# Altium PCB MCU.PcbDoc
Units mil, origin at the board's own origin, x right, y up, seen from the top; angles counter-clockwise.
Board outline 1670 x 1220 mil, 2 copper layers (Top Layer, Bottom Layer); 50 components, 44 nets, 204 pads, 94 vias.
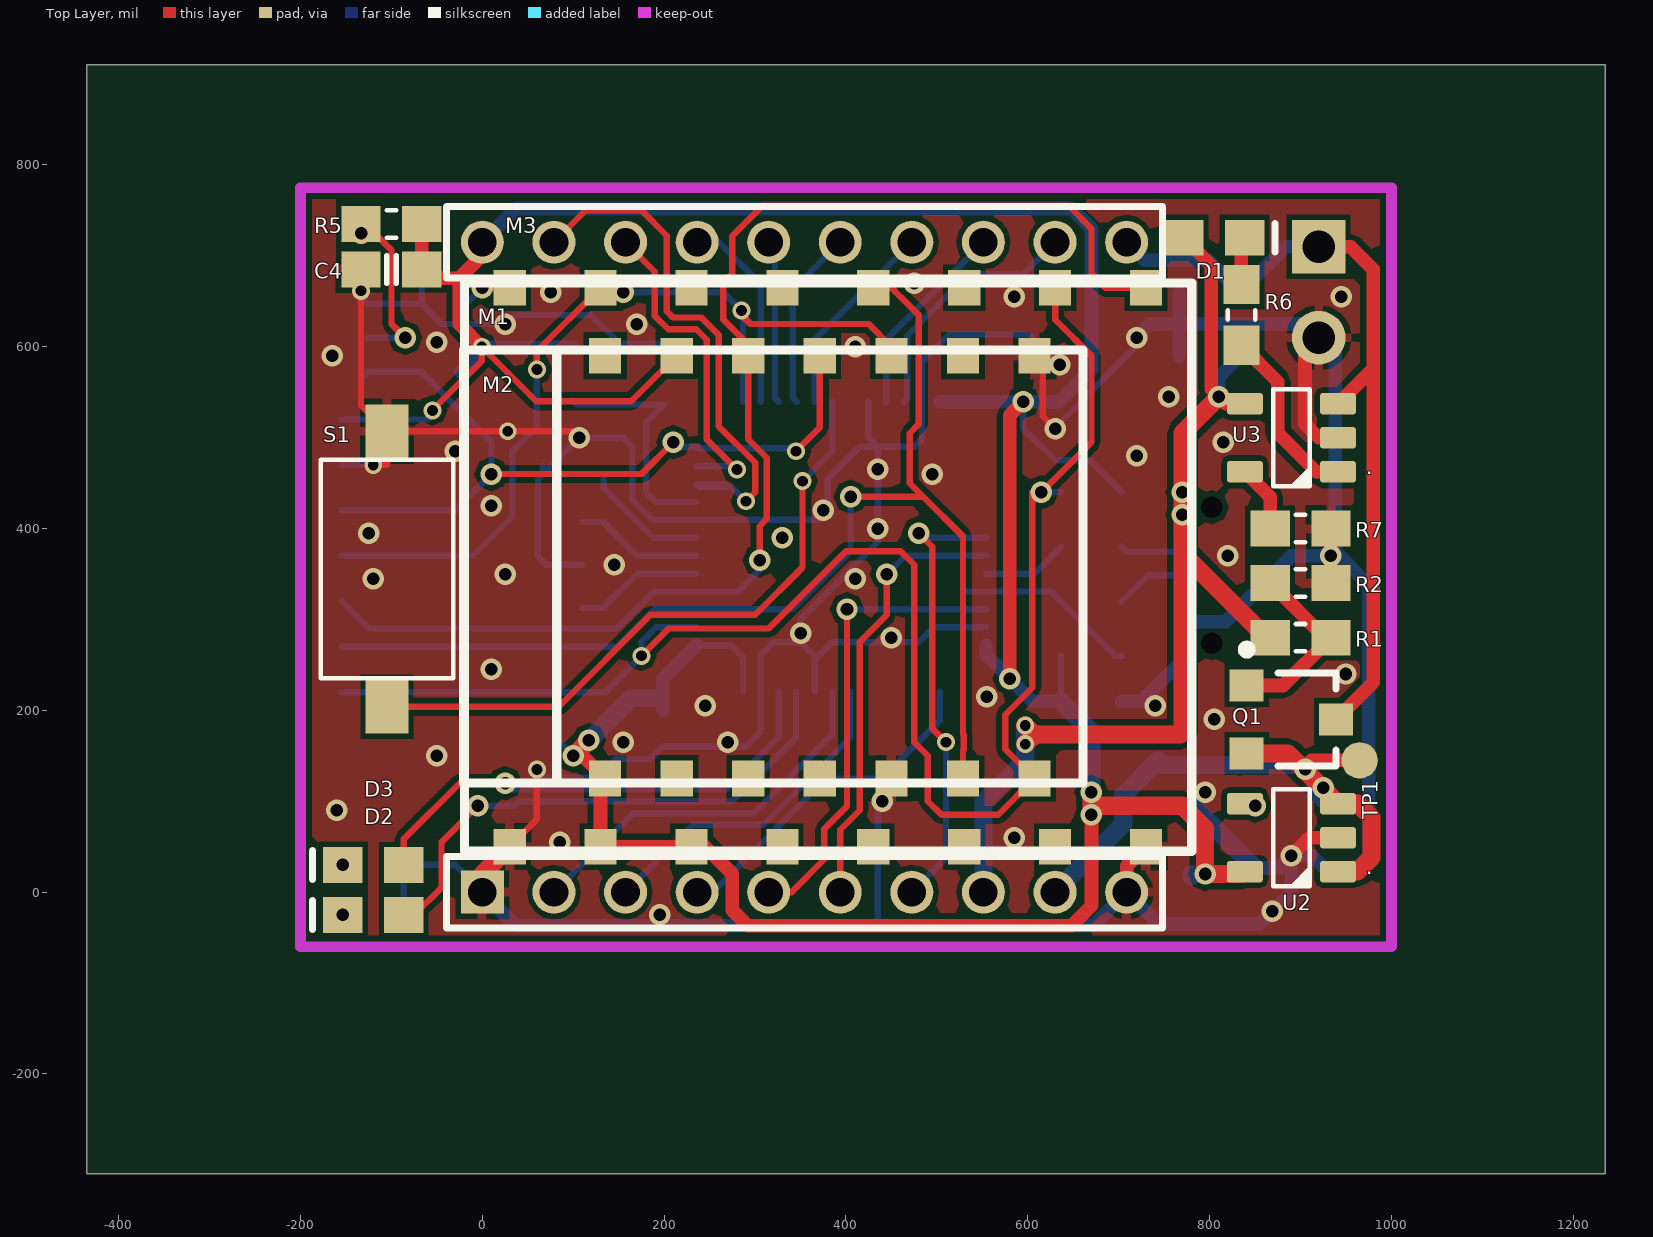
[diagram p0: Top Layer view]
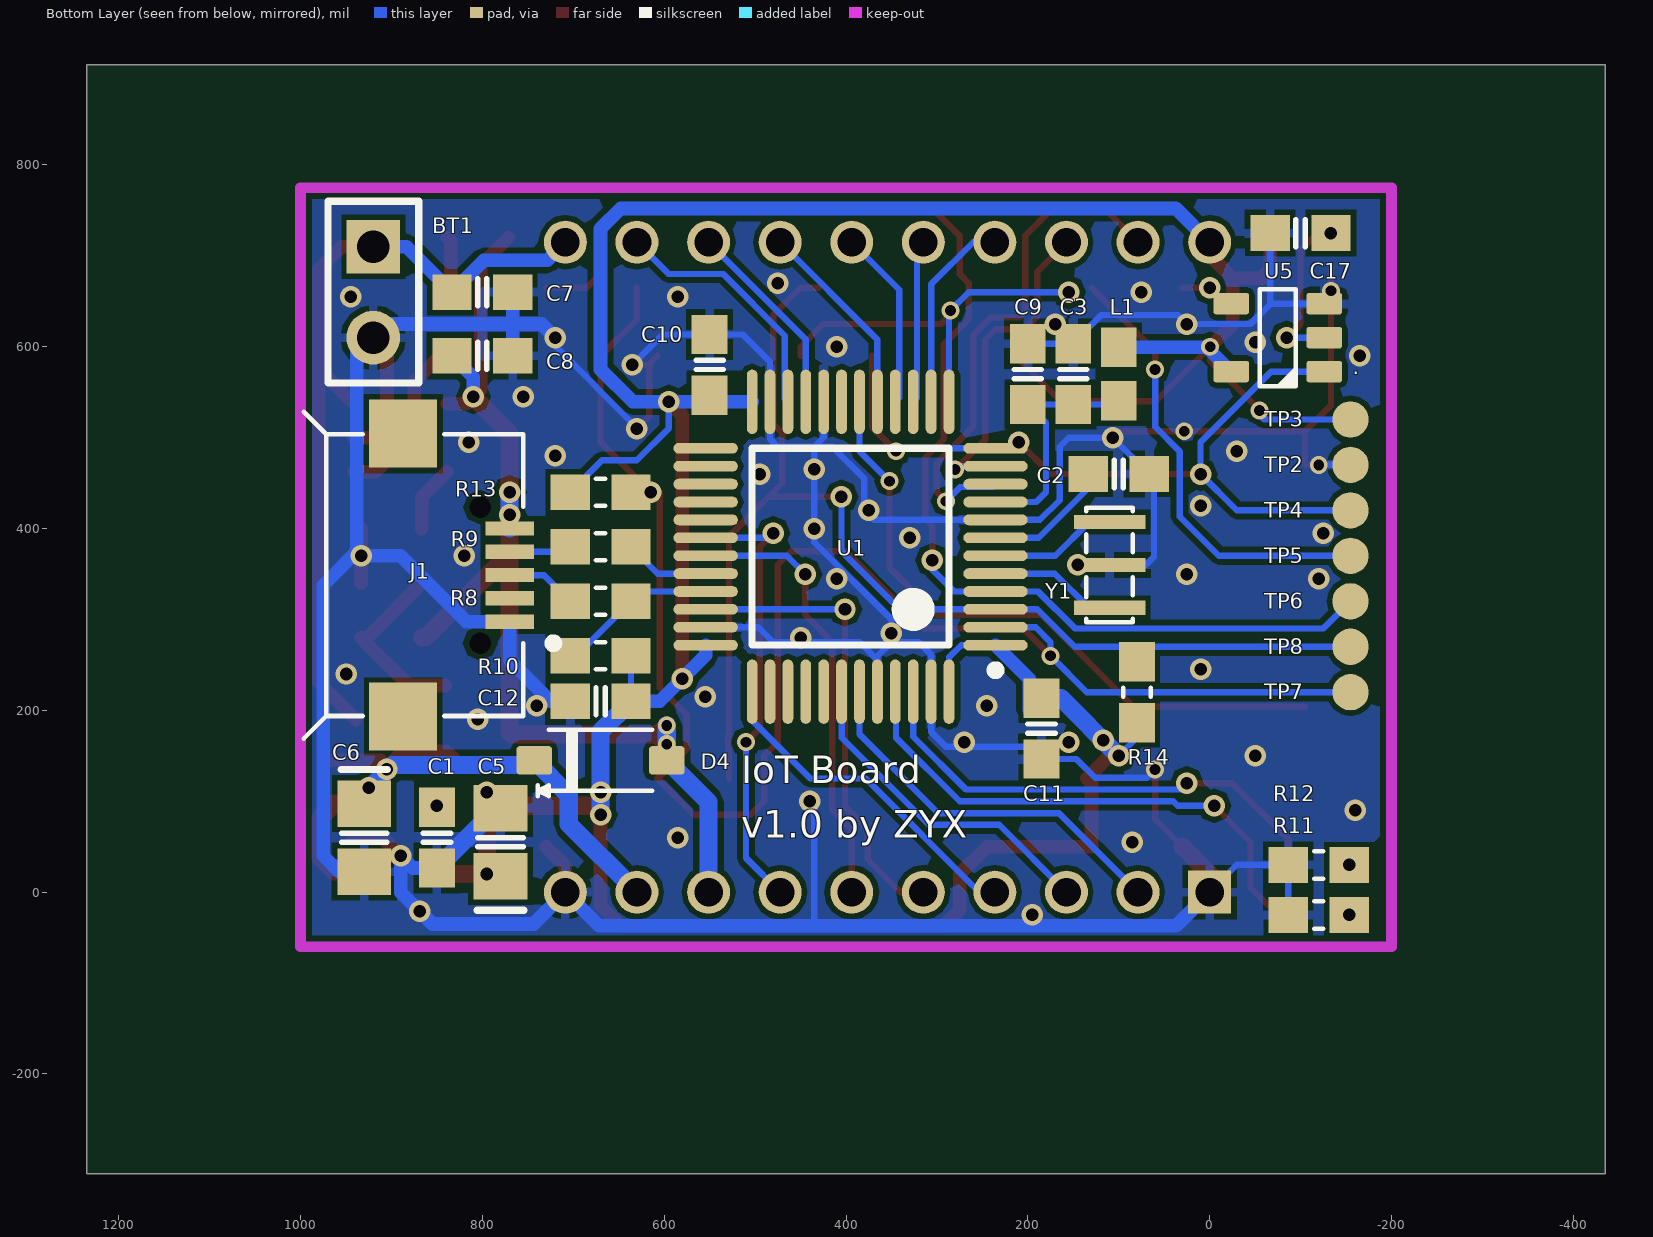
[diagram p1: Bottom Layer view, seen from below]

## Layer stack, top to bottom
Top Layer: signal copper 1.4
Dielectric: dielectric 12.6, FR-4, Dk 4.8
Bottom Layer: signal copper 1.4

## Board outline
-435,-310 1235,-310 1235,910 -435,910

## Design rules (kind name [scope] priority, off if disabled: settings)
Clearance [All] p1: gap=6
ComponentClearance [All] p1: gap=0 collisioncheckmode=3 verticalgap=0 showdistances=FALSE
DiffPairsRouting [All] p1: maxlimit=10 minlimit=10 mostfreqgap=10 maxuncoupledlength=500
HoleToHoleClearance [All] p1: gap=7.87 allowstackedmicrovias=TRUE
MinimumSolderMaskSliver [All] p1: minsoldermaskwidth=0
PolygonConnect PolygonConnect_1 [isvia vs IsPolygon] p1: connectstyle=Direct reliefconductorwidth=10 reliefentries=4 polygonreliefangle="90 Angle"
PolygonConnect [All] p2: connectstyle=Relief reliefconductorwidth=10 reliefentries=4 polygonreliefangle="90 Angle"
RoutingVias [All] p1: holewidth=13.78 width=23.62 viastyle="Through Hole" minholewidth=11.81 minwidth=19.68 maxholewidth=19.68 maxwidth=50
SilkToSilkClearance [All] p1: silktosilkclearance=0
SilkscreenOverComponentPads [All] p1: minsilkscreentomaskgap=0
SolderMaskExpansion [All] p1: expansion=4
Width [All] p1: maxlimit=30 minlimit=7 preferedwidth=7
22 further rules are at their usual default settings.

## Classes and differential pairs
differential pair USB: +USB_P -USB_N

## Components (designator, comment, footprint, x,y, rotation, side; value= is the part's Value field where it differs from the comment)
BT1 "Li-Ion" HDR1X2 920,710 r270 bottom
C1 "Cap Semi" C-1608[0603] 850,60 r270 bottom
C2 "Cap Semi" C-1608[0603] 100,460 r0 bottom
C3 "Cap Semi" C-1608[0603] 150,570 r270 bottom
C4 "Cap Semi" C-1608[0603] -100,685 r0 top
C5 "Cap Semi" C-2012[0805] 780,55 r90 bottom
C6 "Cap Semi" C-2012[0805] 930,60 r270 bottom
C7 "Cap Semi" C-1608[0603] 800,660 r0 bottom
C8 "Cap Semi" C-1608[0603] 800,590 r0 bottom
C9 "Cap Semi" C-1608[0603] 200,570 r270 bottom
C10 "Cap Semi" C-1608[0603] 550,580 r270 bottom
C11 "Cap Semi" C-1608[0603] 185,180 r90 bottom
C12 "Cap Semi" C-1608[0603] 670,210 r180 bottom
C17 "Cap Semi" C-1608[0603] -100,725 r180 bottom
D1 "Charge" LED-1608[0603]-R 805,720 r0 top
D2 "G" LED-1608[0603]-G -120,-25 r180 top
D3 "B" LED-1608[0603]-B -120,30 r180 top
D4 "1N5819" SOD123 670,145 r180 bottom
J1 "USB Micro Type B" "MICRO USB 3D" 770,400 r0 bottom
L1 "Inductor" L-1608[0603] 100,570 r270 bottom
M1 "MT7681 Module" MT7681-EXTANT-1 30,50 r0 top
M2 "ESP8266-ESP03" ESP8266-ESP03 135,125 r0 top
M3 "MCU_IF_V1" MCU_IF_V1 0,0 r0 top
Q1 "SI2301" SOT23B 890,190 r270 top
R1 "Res Semi" R-1608[0603] 900,280 r0 top
R2 "Res Semi" R-1608[0603] 900,340 r0 top
R5 "Res Semi" R-1608[0603] -100,735 r180 top
R6 "Res Semi" R-1608[0603] 835,635 r270 top
R7 "Res Semi" R-1608[0603] 900,400 r180 top
R8 "Res Semi" R-1608[0603] 670,320 r180 bottom
R9 "Res Semi" R-1608[0603] 670,380 r180 bottom
R10 "Res Semi" R-1608[0603] 670,260 r180 bottom
R11 "Res Semi" R-1608[0603] -120,-25 r0 bottom
R12 "Res Semi" R-1608[0603] -120,30 r0 bottom
R13 "Res Semi" R-1608[0603] 670,440 r180 bottom
R14 "Res Semi" R-1608[0603] 80,220 r90 bottom
S1 "Button" SW-2PIN-SMD -105,200 r90 top
TP1 "VDD" TESTPOINT 965,145 r90 top
TP2 "GND" TESTPOINT -155,470 r90 bottom
TP3 "VCC" TESTPOINT -155,520 r90 bottom
TP4 "W_RXD" TESTPOINT -155,420 r90 bottom
TP5 "W_TXD" TESTPOINT -155,370 r90 bottom
TP6 "W_RST" TESTPOINT -155,320 r90 bottom
TP7 "W_IO0" TESTPOINT -155,220 r90 bottom
TP8 "W_IO2" TESTPOINT -155,270 r90 bottom
U1 "STM32F103CBT6" LQFP48_N 395,380 r0 bottom
U2 "MIC5219-3.3" SOT23-5 890,60 r180 top
U3 "MCP73831" SOT23-5 890,500 r180 top
U5 "74LVC1G08" SOT23-5 -75,610 r0 bottom
Y1 "8M" Crystal_C 110,360 r90 bottom

## Footprints (in the part's own frame and the unit in brackets; to place one, negate y for a bottom-side part, rotate by r counter-clockwise, add the part's x,y. Pads: shape width x height; smd on the part's side, far side on the other; paste and mask are expansions set on the pad)
C-1608[0603] [mm] "Chip Capacitor; Body 1.6 x 0.8 mm (LxW typ)"
  rect 1.1x1 smd: 1(-0.85,0) 2(0.85,0)
  silkscreen extent -0.13,-0.38 0.13,0.38, body extent -0.8,-0.42 0.8,0.38, height 0.29
C-2012[0805] [mm] "Chip Capacitor; Body 2.0 x 1.2 mm (LxW typ)"
  rect 1.3x1.5 smd: 1(-0.95,0) 2(0.95,0)
  silkscreen extent -1.9,-0.65 0.13,0.65, body extent -1,-0.64 1,0.62, height 0.78
Crystal_C [mm] "含电容晶振，村田 3."
  rect 0.4x2 smd: 1(-1.2,0) 2(0,0) 3(1.2,0)
  silkscreen extent -1.6,-0.65 1.6,0.65, body extent -1.6,-0.64 1.6,0.67, height 0.7
ESP8266-ESP03 [mm]
  rect 0.9x1 smd: 1(0,0) 2(2,0) 3(4,0) 4(6,0) 5(8,0) 6(10,0) 7(12,0) 8(12,11.811) 9(10,11.811) 10(8,11.811) 11(6,11.811) 12(4,11.811) 13(2,11.811) 14(0,11.811)
  silkscreen extent -3.95,-0.13 13.35,11.97
HDR1X2 [mm] "Connector; Header; 2 Position"
  rect 1.5x1.5 hole 0.9: 1(0,0)
  round 1.5 hole 0.9: 2(2.54,0)
  silkscreen extent -1.27,-1.27 3.81,1.27
L-1608[0603] [mm] "Chip Inductor, Body 1.6x0.8mm, IPC Medium Density"
  rect 1.1x1 smd: 1(-0.75,0) 2(0.75,0)
  body extent -0.8,-0.41 0.8,0.39, height 0.45
LED-1608[0603]-B [mm] "Chip Diode; Body 1.6 x 0.8 mm (LxW typ)"
  rect 1.1x1 smd: 1(-0.85,0) 2(0.85,0)
  silkscreen extent 1.7,-0.4 1.7,0.4, body extent -0.85,-0.44 0.85,0.46, height 0.9
LED-1608[0603]-G [mm] "Chip Diode; Body 1.6 x 0.8 mm (LxW typ)"
  rect 1.1x1 smd: 1(-0.85,0) 2(0.85,0)
  silkscreen extent 1.7,-0.4 1.7,0.4, body extent -0.85,-0.44 0.85,0.46, height 0.9
LED-1608[0603]-R [mm] "Chip Diode; Body 1.6 x 0.8 mm (LxW typ)"
  rect 1.1x1 smd: 1(-0.85,0) 2(0.85,0)
  silkscreen extent 1.7,-0.4 1.7,0.4, body extent -0.82,-0.44 0.88,0.46, height 0.9
LQFP48_N [mm] "Thin QFP, 48-Leads, Body 7x7mm, Pitch 0.5mm, IPC Medium Density"
  oval 1.8x0.3 smd: 1(-4.05,2.75) 2(-4.05,2.25) 3(-4.05,1.75) 4(-4.05,1.25) 5(-4.05,0.75) 6(-4.05,0.25) 7(-4.05,-0.25) 8(-4.05,-0.75) 9(-4.05,-1.25) 10(-4.05,-1.75) 11(-4.05,-2.25) 12(-4.05,-2.75) 25(4.05,-2.75) 26(4.05,-2.25) 27(4.05,-1.75) 28(4.05,-1.25) 29(4.05,-0.75) 30(4.05,-0.25) 31(4.05,0.25) 32(4.05,0.75) 33(4.05,1.25) 34(4.05,1.75) 35(4.05,2.25) 36(4.05,2.75)
  oval 0.3x1.8 smd: 13(-2.75,-4.05) 14(-2.25,-4.05) 15(-1.75,-4.05) 16(-1.25,-4.05) 17(-0.75,-4.05) 18(-0.25,-4.05) 19(0.25,-4.05) 20(0.75,-4.05) 21(1.25,-4.05) 22(1.75,-4.05) 23(2.25,-4.05) 24(2.75,-4.05) 37(2.75,4.05) 38(2.25,4.05) 39(1.75,4.05) 40(1.25,4.05) 41(0.75,4.05) 42(0.25,4.05) 43(-0.25,4.05) 44(-0.75,4.05) 45(-1.25,4.05) 46(-1.75,4.05) 47(-2.25,4.05) 48(-2.75,4.05)
  silkscreen extent -4.17,-2.75 2.75,3.57, body extent -3.5,-3.5 3.5,3.5, height 1.6
MCU_IF_V1 [mm]
  rect 1.2x1.2 hole 0.8: 1(0,0)
  round 1.2 hole 0.8: 2(2,0) 3(4,0) 4(6,0) 5(8,0) 6(10,0) 7(12,0) 8(14,0) 9(16,0) 10(18,0) 11(18,18.161) 12(16,18.161) 13(14,18.161) 14(12,18.161) 15(10,18.161) 16(8,18.161) 17(6,18.161) 18(4,18.161) 19(2,18.161) 20(0,18.161)
  silkscreen extent -1,-1 19,19.16, body extent -0.97,-1 18.97,19.16, height 6
"MICRO USB 3D" [mm]
  rect 1.35x0.4 smd: 1(0,0) 2(0,0.65) 3(0,1.3) 4(0,1.95) 5(0,2.6)
  round 0 hole 0.6: HOLE(0.827,-0.6) HOLE(0.827,3.2)
  rect 1.9x1.9 smd: ""(2.977,-2.65) ""(2.977,5.25)
  silkscreen extent -1.35,-3.27 5.76,5.87, body extent -0.29,-3.13 5.33,5.67, height 2.79
MT7681-EXTANT-1 [mm]
  rect 0.9x1 smd: 1(0,0) 2(2.54,0) 3(5.08,0) 4(7.62,0) 5(10.16,0) 6(12.7,0) 7(15.24,0) 8(17.78,0) 9(17.78,15.621) 10(15.24,15.621) 11(12.7,15.621) 12(10.16,15.621) 13(7.62,15.621) 14(5.08,15.621) 15(2.54,15.621) 16(0,15.621)
  silkscreen extent -1.26,-0.13 19.06,15.75
R-1608[0603] [mm] "Chip Resistor; Body 1.6 x 0.8 mm (LxW typ)"
  rect 1.1x1 smd: 1(-0.85,0) 2(0.85,0)
  silkscreen extent -0.13,-0.38 0.13,0.38, body extent -1.27,-0.51 1.33,0.49, height 0.48
SOD123 [mm] "SOD-123; 2 Leads; Body 2.7 x 1.6 mm, (LxW)"
  round 0.508 on Mech15: 0(0,0)
  rrect25% 1x0.8 smd: 1(1.85,0) 2(-1.85,0)
  silkscreen extent -1.75,-1 1.45,0.85, body extent -1.95,-0.9 1.95,0.9, height 1.18
SOT23-5 [mm]
  round 0.5 on Mech15: 0(0,0)
  rrect25% 1x0.6 smd: 1(-1.3,0.95) 2(-1.3,0) 3(-1.3,-0.95) 4(1.3,-0.95) 5(1.3,0.95)
  silkscreen extent -0.51,-1.35 0.51,1.35, body extent -1.4,-1.45 1.4,1.45, height 1.44
SOT23B [mm] "SOT-23; 3 Leads; Body 3.0 x 2.6 mm, inc. leads (LxW max)"
  rect 0.9x0.95 smd: 1(-0.95,-1.25) 2(0.95,-1.25) 3(0,1.25)
  silkscreen extent -2.07,-1.37 1.3,1.25, body extent -1.52,-1.27 1.48,1.27, height 1.1
SW-2PIN-SMD [mm] "3*6*2.5mm Button"
  rect 1.5x1.2 smd: 1(0.1,0) 2(7.8,0)
  silkscreen extent 0.9,-1.85 7,1.85, body extent -0.08,-1.8 7.92,1.8, height 2.5
TESTPOINT [mil]
  round 40 smd: 1(0,0)

## Part data
BT1: library part Battery, "Multicell Battery"
C1 C2 C3 C4 C5 C6 C7 C8 C9 C10 C11 C12 C17: "Capacitor (Semiconductor SIM Model)"
D1 D2 D3: library part LED2, "Typical RED, GREEN, YELLOW, AMBER GaAs LED"
D4: library part "D Schottky", "Schottky Diode"
J1: library part USB_Micro_TypeB, "Connector SMD USB Micro Type B middle mount"
M1: library part MT7681_EXTANT_1
Q1: library part MOSFET-P, "P-Channel MOSFET"
R1 R2 R5 R6 R7 R8 R9 R10 R11 R12 R13 R14: "Semiconductor Resistor"
S1: library part SW-PB, "Switch"
TP1 TP2 TP3 TP4 TP5 TP6 TP7 TP8: library part Plug, "Plug"
U1: "STM32 ARM-based 32-bit MCU with 128 Kbytes Flash, 48-pin LQFP, Industrial Temperature"
U2: library part MIC5219, "500mA-Peak Output LDO Regulator"
U3: "Miniature Single-Cell, Fully Integrated Li-Ion, Li-Polymer Charge Management Controllers"
Y1: library part XTAL_C, "Crystal Oscillator"

## Via types
v1: diameter 23.62, hole 13.78, Top Layer to Bottom Layer, tented both sides, 77 vias
v2: diameter 19.68, hole 11.81, Top Layer to Bottom Layer, tented both sides, 16 vias
v3: diameter 23.62, hole 13.78, Top Layer to Bottom Layer, 1 vias

## Nets (pads, with @x,y where several pads share a name; then routed paths per layer and width w, separated by ;. In a path a pad name is that pad's centre, name@x,y a point inside that pad or via, vN(x,y) a via of type N, cw(c..) or ccw(c..) an arc to the next point about the centre after c; other vN are vias at no path point)
AVCC: C3.2 C9.2 L1.2 U1.9 | length 266.5
  Bottom Layer w7: L1.2 103.94,536.54 C9.2 180,516.54 180,440 190.79,429.21 U1.9
GND: BT1.2 C1.2 C2.1 C3.1 C4.1 C5.2 C6.2 C7.1 C8.1 C9.1 C10.1 C11.1 C12.1 C17.1 J1.5 M1.1 M1.8 M2.5 M2.8 M3.1 M3.10 R2.2 R7.1 R11.2 R12.2 S1.2 TP2.1 U1.8 U1.20 U1.23 U1.35 U1.44 U1.47 U2.2 U3.2 U5.3 Y1.2 | length 6414.1
  Top Layer w7: C4.1 v2(-133.46,661.54) -133.46,535.55 S1.2 ; v2(-120,470) -105,470 S1.2 ; M1.1 60,80 v2(60,135) ; v1(106.54,500) 99.45,507.09 v2(27.91,507.09) S1.2 ; v1@625,510 v1(630,510) 616.31,523.69 616.31,581.13 M2.8 617.44,580 v1(635,580)
  Top Layer w15: M3.10 708.66,28.66 M1.8 ; v1(890,40) 910,60 U2.2 ; BT1.2 905,595 905,515 920,500 U3.2 ; R2.2 R7.1
  Top Layer w20: M3.1 0,20 M1.1
  Bottom Layer w7: TP2.1 v2(-120,470) ; v2(-133.46,661.54) -133.46,654.68 U5.3 -67.4,647.4 ; R11.2 R12.2 -30,30 M3.1 ; C17.1 -66.54,648.27 -67.4,647.4 ; v2(60,135) 69,126 126,126 146.54,146.54 C11.1 198.46,160 290,160 306.42,176.42 306.42,261.42 320,275 v1@350,275 ; C2.1@66.54,468.46 C2.1 ; Y1.2 70,360 61.13,368.87 61.13,454.59 C2.1 ; C9.1 C3.1 150,604.3 119.3,635 35,635 v1(25,625) -45,625 -67.4,647.4 ; U1.20 424.53,500.47 435,490 ; 435,-37.12 435,100 v1(440,100) ; U1.35 496.42,291.42 480,275 385,275 365.47,255.47 U1.44 365.47,259.53 v1@350,275 ; v1@625,510 v1(630,510) ; v1@629.52,510.48 720,600.96 v1(720,610) v1@716.54,613.46 ; v1(635,580) 601.54,613.46 C10.1 513.46,613.46 483.58,583.58 483.58,498.58 475,490 435,490 ; C2.1 v1(106.54,500) 155,500 165,490 165,431.31 186.78,409.53 U1.8 369.53,409.53 380,420 380,455 415,490 435,490 ; v1@350,275 350,300 435,385 435,490
  Bottom Layer w15: M3.1 37.12,-37.12 671.54,-37.12 M3.10 743.66,-35 855,-35 890,0 v1(890,40) ; C12.1 725,210 770,255 J1.5 817.64,297.64 890,370 v1(933.46,370) v1@938.11,374.64 ; v1(720,610) 735,625 905,625 BT1.2 938.11,591.89 v1@938.11,374.64 ; C8.1 C7.1 ; C5.2 C5.2@784.13,92.4 ; C1.2 876.54,26.54 v1(890,40) ; v1(890,40) 912.6,40 C6.2 957.6,22.6 975,40 975,337.75 v1@938.11,374.64
  Bottom Layer w20: C5.2@784.13,92.4 C1.2
  other v1: 195,-25 868.8,-21.2 85,55 585,60 -160,90 795,110 -50,150 155,165 270,165 805,190 245,205 740,205 555,215 950,240 10,245 450,280 350,285 -120,345 25,350 145,360 820,370 330,390 -125,395 435,400 375,420 10,425 495,460 435,465 720,480 -30,485 815,495 755,545 -165,590 410,600 -50,605 170,625 585,655 945,655 75,660 475,670
  other v3: 410,345
KEY: S1.1 U1.18 | length 716.6
  Top Layer w7: S1.1 83.94,203.94 185,305 300,305 352.17,357.17 v2(352.17,452.17)
  Bottom Layer w7: v2(352.17,452.17) 385.16,485.16 U1.18
LED_B: D3.1 U1.46 | length 547.1
  Top Layer w7: D3.1 -86.54,58.46 -25,120 v1(25,120)
  Bottom Layer w7: v1(25,120) 25,113 268,113 326.1,171.1 U1.46
LED_G: D2.1 U1.45 | length 592.1
  Top Layer w7: D2.1 -75,-25 -45,5 -45,55 v1(-5,95)
  Bottom Layer w7: v1(-5,95) 35,95 40,100 275,100 345,170 U1.45@345,220.55
MT_RX: M1.16 U5.4 | length 61.1
  Top Layer w7: v1(0,665) M1.16
  Bottom Layer w7: U5.4 -17.6,647.4 v1(0,665)
NetC1_1: C1.1 U2.4
  other v1: 850,95
NetC2_2: C2.2 U1.7 | length 140.3
  Bottom Layer w7: C2.2 133.46,444.46 158.87,419.05 188.08,389.84 199.03,389.84 U1.7
NetC17_2: C17.2 R5.2 U5.2 | length 189.1
  Top Layer w7: R5.2 -128.69,735 -100,706.31 -100,625 v1(-85,610)
  Bottom Layer w7: U5.2 v1(-85,610)
  other v1: -133.46,725
NetD1_2: D1.2 R6.1 | length 53
  Top Layer w15: R6.1 835,716.54 D1.2
NetD2_2: D2.2 R11.1
  other v1: -153.46,-25
NetD3_2: D3.2 R12.1
  other v1: -153.46,30
NetJ1_2: J1.2 R9.1 | length 68.9
  Bottom Layer w7: R9.1 709.05,374.41 J1.2
NetJ1_3: J1.3 R8.1 | length 78.5
  Bottom Layer w7: R8.1 732.28,348.82 J1.3
NetQ1_2: Q1.1 R1.2 R2.1 | length 206.2
  Top Layer w15: Q1.1 880.87,227.4 R1.2 926.97,280 866.97,340 R2.1
NetR6_2: R6.2 U3.1 | length 196.8
  Top Layer w15: R6.2 875,561.54 875,505 917.4,462.6 U3.1
NetR7_2: R7.2 U3.5 | length 74.1
  Top Layer w15: U3.5 866.54,434.88 R7.2
NetU1_5: U1.5 Y1.1 | length 141.2
  Bottom Layer w7: Y1.1 132.76,312.76 170.47,350.47 U1.5
NetU1_6: U1.6 Y1.3 | length 140.9
  Bottom Layer w7: Y1.3 132.76,407.24 169.84,370.16 U1.6
PA0: M3.19 U1.10 | length 598.7
  Top Layer w7: M3.19 113.74,750 175,750 202.78,722.22 202.78,639.16 209.76,632.19 240.78,632.19 260,612.96 260,512.35 300,472.35 300,440 v2(290,430)
  Bottom Layer w7: U1.10@267.18,448.9 U1.10 238.79,445.66 274.34,445.66 v2(290,430)
PA1: M3.18 U1.11 | length 364.9
  Top Layer w7: M3.18 189.78,682.7 189.78,633.78 204.38,619.19 235.39,619.19 247,607.58 247,498 v2(280,465)
  Bottom Layer w7: U1.11 276.42,468.58 v2(280,465)
PA4: M3.17 U1.14 | length 218.6
  Bottom Layer w7: M3.17 260,715 306.42,668.58 U1.14
PA5: M3.16 U1.15 | length 199.8
  Bottom Layer w7: M3.16@301.1,701.14 M3.16 321.82,708.14 321.82,543.73 U1.15
PA6: M3.15 U1.16 | length 198.9
  Bottom Layer w7: U1.16 341.51,543.73 341.51,662.81 M3.15
PA7: M3.14 U1.17 | length 219.9
  Bottom Layer w7: U1.17 365.47,608.03 M3.14
PA9: M3.7 U1.30 | length 499.6
  Top Layer w7: v1(480,395) 495,380 495,180 v2(510,165)
  Bottom Layer w7: M3.7 510,37.56 v2(510,165) ; v1(480,395) 485.16,389.84 U1.30
PA10: M3.6 U1.31 | length 489.1
  Top Layer w7: M3.6 393.7,68.7 415,90 415,275.14 441.17,301.31 441.31,301.31 445,305 v1(445,350)
  Bottom Layer w7: v1(445,350) 465.16,370.16 U1.31
PA13: M3.5 U1.34 | length 514.8
  Top Layer w7: M3.5 340,0 376.1,36.1 376.1,69.49 401.1,94.49 v1(401.1,311.1)
  Bottom Layer w7: v1(401.1,311.1) U1.34
PA14: M3.4 U1.37 | length 376.9
  Bottom Layer w7: M3.4 253.38,0 378.38,125 439.35,125 503.27,188.92 U1.37
PB6: M3.3 U1.42 | length 368.4
  Bottom Layer w7: M3.3 231.48,74 309,74 404.84,169.84 U1.42
PB7: M3.2 U1.43 | length 425.3
  Bottom Layer w7: M3.2 165.74,87 298.62,87 385.16,173.54 U1.43
PB10: M3.13 U1.21 | length 219.9
  Bottom Layer w7: U1.21 444.21,583.03 444.21,608.03 M3.13
PB11: M3.12 U1.22 | length 279.4
  Bottom Layer w7: U1.22 467.28,542.83 467.28,587.28 467.28,612.28 535,680 594.92,680 M3.12
USB_N: R9.2 U1.32 | length 94.3
  Bottom Layer w7: U1.32 607.01,350.47 R9.2
USB_P: R8.2 R10.1 U1.33 | length 203.3
  Bottom Layer w7: U1.33@529.45,330.79 625.75,330.79 696.54,260 R10.1
VBAT: BT1.1 C7.2 M3.11 Q1.3 U3.3 | length 892
  Top Layer w15: BT1.1 955,710 980,685 980,576.22 ; Q1.3 980,230.79 980,576.22 ; U3.3 980,576.22
  Bottom Layer w15: M3.11 728.66,695 798.46,695 C7.2 883.46,710 BT1.1
VCC: C4.2 C5.1 C10.2 C11.2 C12.2 L1.1 M1.2 M1.3 M2.1 M2.13 M3.20 R5.1 R10.2 R13.1 R14.1 TP3.1 U1.1 U1.24 U1.36 U1.48 U2.5 U5.5 | length 4094.9
  Top Layer w7: v2(-55,530) -0.62,584.38 v2(-0.62,600) 59.38,540 163.74,540 M2.13
  Top Layer w15: R5.1 C4.2 -57.02,675.48 -25.31,675.48 ; M3.20@-5,720 M3.20 0,700.8 -25.31,675.48 ; v2(-0.62,600) -25.31,624.69 -25.31,675.48 ; v1(100,150) 110,150 M2.1 130,120 M1.2 245,50 275,20 275,-20 292.12,-37.12 647.88,-37.12 670,-15 v1@670,95 ; v1(580,235) 580,524.45 v1(595,539.45)
  Top Layer w20: v1(100,150) v1(117.22,167.22) ; v1(670,110) 670,95 770,95 795,70 v1(795,20) 836.22,20 U2.5
  Bottom Layer w7: TP3.1 -60,520 -55,525 v2(-55,530) ; R14.1 80,170 v1(100,150) ; U1.1 273.27,271.73 286.73,258.27 U1.48 ; v1(595,539.45) 595,510 630,475 668.46,475 R13.1 ; C12.2 R10.2
  Bottom Layer w15: U5.5 3.11,599.53 L1.1 ; M3.20 37.12,752.12 647.88,752.12 670,730 670,575 634.45,539.45 U1.24 ; C11.2@198.46,200 198.46,234.65 U1.1 ; U1.36 554.45,260.55 605,210 C12.2
  Bottom Layer w20: v1(100,150) 163.46,213.46 C11.2 ; C12.2 670,176.54 v1(670,85) ; C5.1 C5.1@780,20
VDD: C6.1 D4.2 M3.9 Q1.2 TP1.1 U2.1 U2.3 | length 739
  Top Layer w15: v1@902.64,135.94 911.69,145 TP1.1
  Top Layer w20: Q1.2@833.19,145 Q1.2 885.98,152.6 U2.3 962.6,97.4 978.09,81.91 978.09,38.09 962.6,22.6 U2.1
  Bottom Layer w20: M3.9 705,75.08 705,107.17 D4.2 747.93,139.91 898.68,139.91 C6.1@924.29,114.29 ; C6.1@914.14,113.26 C6.1
  other v1: 925,115 905,135
VUSB: C8.2 D1.1 D4.1 J1.1 M3.8 R1.1 U3.4 | length 1234
  Top Layer w15: D1.1 801.81,689.72 801.81,553.19 v1(810,545) 817.6,537.4 U3.4
  Top Layer w20: v2(597.17,162.83) 607.81,173.48 767.81,173.48 767.81,175 770,175 770,372.57 ; v2(597.17,183.28) 606.97,173.48 ; v1(810,545) 770,505 770,372.57 ; R1.1 862.57,280 770,372.57
  Bottom Layer w15: v1(810,545) 810,566.54 C8.2
  Bottom Layer w20: M3.8 551.18,99.02 D4.1 v2(597.17,162.83) v2(597.17,183.28) ; J1.1 v1(770,440)
  other v1: 770,415
W_IO0: M1.10 M2.7 R13.2 TP7.1 U1.2 | length 1857.6
  Top Layer w7: v2(175,260) 205,290 315,290 400,375 460,375 475,360 475,165 490,150 490,100 505,85 567.44,85 M2.7 ; M2.7 575,157.42 575,195 605,225 605,440 v1(615,440) 670,495 670,589.86 630,629.86 M1.10
  Bottom Layer w7: TP7.1 135,220 v2(175,260) 175,275 191.42,291.42 U1.2 U1.2@203.92,291.42 ; v1(615,440) R13.2
W_IO2: M1.12 M2.6 R14.2 TP8.1 U1.3 | length 1345
  Top Layer w7: v1(405,435) 485,435 ; M1.12 450,665 453.69,661.31 453.69,661.17 466.17,648.69 466.31,648.69 480,635 480,515 470,505 470,450 485,435 ; M2.6 528.7,156.35 529.34,156.99 529.34,173.01 528.7,173.65 528.7,391.3 485,435
  Bottom Layer w7: TP8.1 148.38,270 189.49,311.1 U1.3 341.1,311.1 405,375 v1(405,435)
W_RST: M1.9 M2.12 TP6.1 U1.4 | length 1428.9
  Top Layer w7: v1(305,365) 305,402.66 313,410.66 313,477.74 292.48,498.26 292.48,602.52 265,630 265,670 275,680 275,721.88 308.12,755 645,755 670,730 670,680 685,665 M1.9
  Bottom Layer w7: TP6.1 -125,290 147.92,290 188.71,330.79 U1.4 280.79,330.79 305,355 v1(305,365)
W_RXD: M2.11 TP4.1 U1.12 U5.1 | length 874
  Top Layer w7: v1(10,460) 175,460 v1(210,495) v1@210,490 ; v2(345,485) 371.22,511.22 M2.11
  Bottom Layer w7: TP4.1 -30,420 v1(10,460) ; U5.1@-130,568.78 U5.1 -67.6,572.6 10,495 v1(10,460) ; v1@12.81,460 v1(10,460) ; v1(210,495) 210,490 237.28,490 U1.12 341.73,488.27 v2(345,485)
W_TXD: M1.15 M2.10 TP5.1 U1.13 | length 932
  Top Layer w7: v2(60,575) 60,595 M1.15 ; v2(285,640) 285,635 295,625 425,625 449.96,600.04 M2.10
  Bottom Layer w7: TP5.1 -10,370 33,413 33,484.82 60,511.82 v2(60,575) ; v1(155,660) 265,660 v2(285,640) 286.73,638.27 U1.13
pads on no net: D4.0 J1. J1.4 J1.HOLE M1.4 M1.5 M1.6 M1.7 M1.11 M1.13 M1.14 M2.2 M2.3 M2.4 M2.9 M2.14 U1.19 U1.25 U1.26 U1.27 U1.28 U1.29 U1.38 U1.39 U1.40 U1.41 U2.0 U3.0 U5.0

## Polygon pours and split planes (outlines as drawn)
GND on Bottom Layer "Bottom Layer-No Net" (solid, remove dead copper, pour order 1000): -200,775 -200,-60 1000,-60 1000,775
GND on Top Layer "Bottom Layer-No Net" (solid, remove dead copper, pour order 1001): -200,775 -200,-60 1000,-60 1000,775

## Keep-outs
Keep-Out Layer:
  lines w11.81: -200,-60 1000,-60 1000,775 -200,775 -200,-60

## Silkscreen, mask and mechanical layers (free items; w line width, h text height)
Bottom Overlay:
  text "IoT Board" at 515,120 h30
  text "v1.0 by ZYX" at 515,60 h30